# Altium PCB CH32V003_V0.1.PcbDoc
Units mm, origin at the board's own origin, x right, y up, seen from the top; angles counter-clockwise.
Board outline 28.32 x 50.93 mm, 4 copper layers (SIG1, GND, PWR, SIG2), stack 1.57 mm thick; 25 components, 32 nets, 101 pads, 315 vias.
Unrouted connection lines stored in the file: 7.
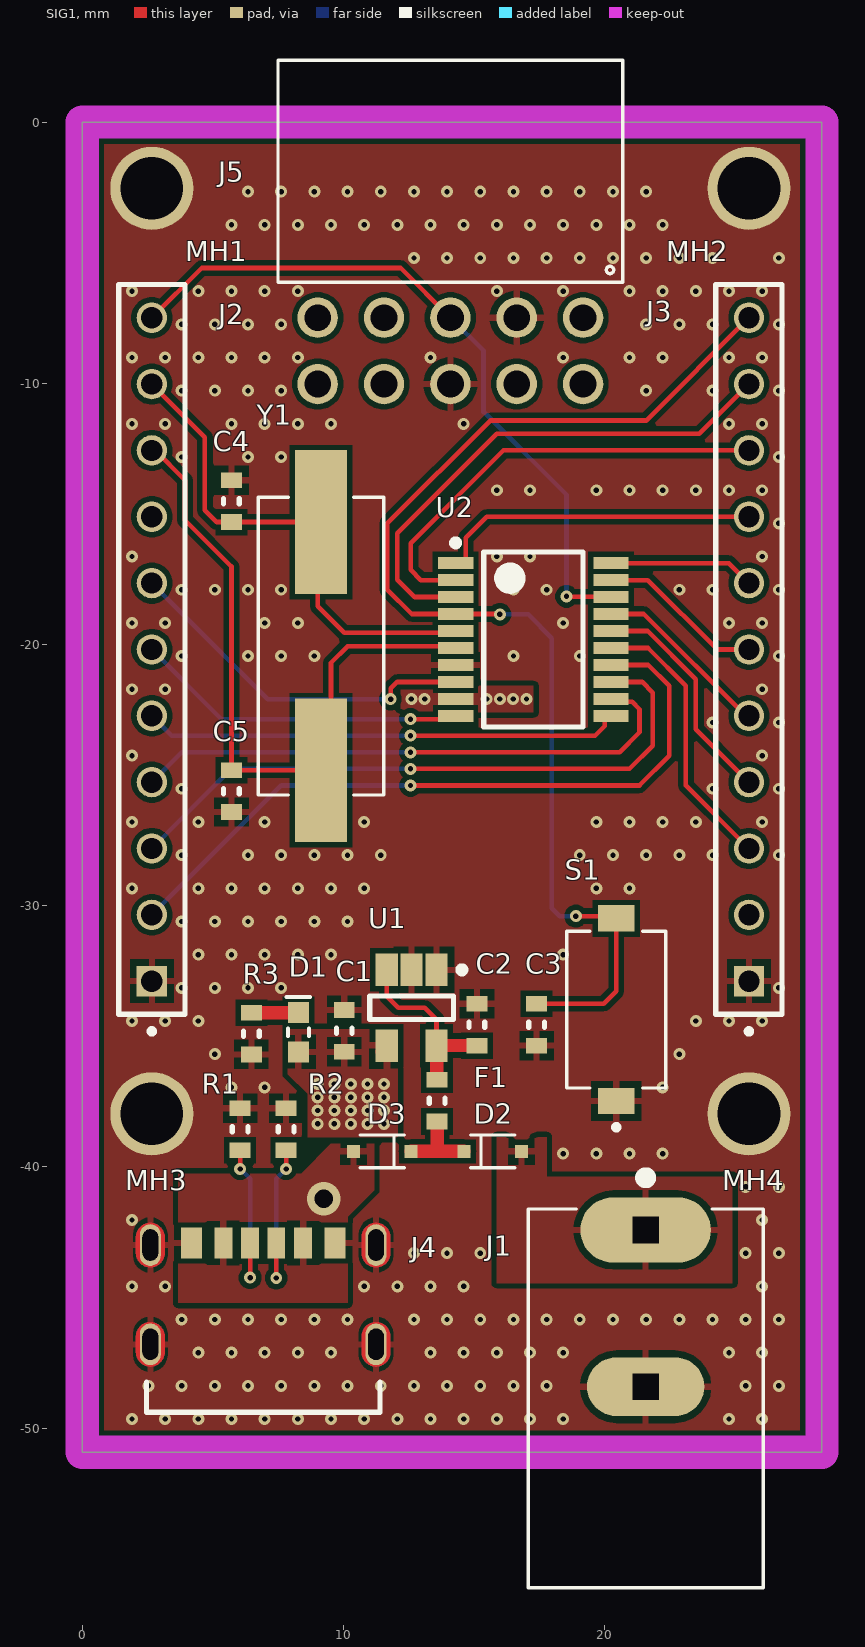
[diagram p0: SIG1 view]
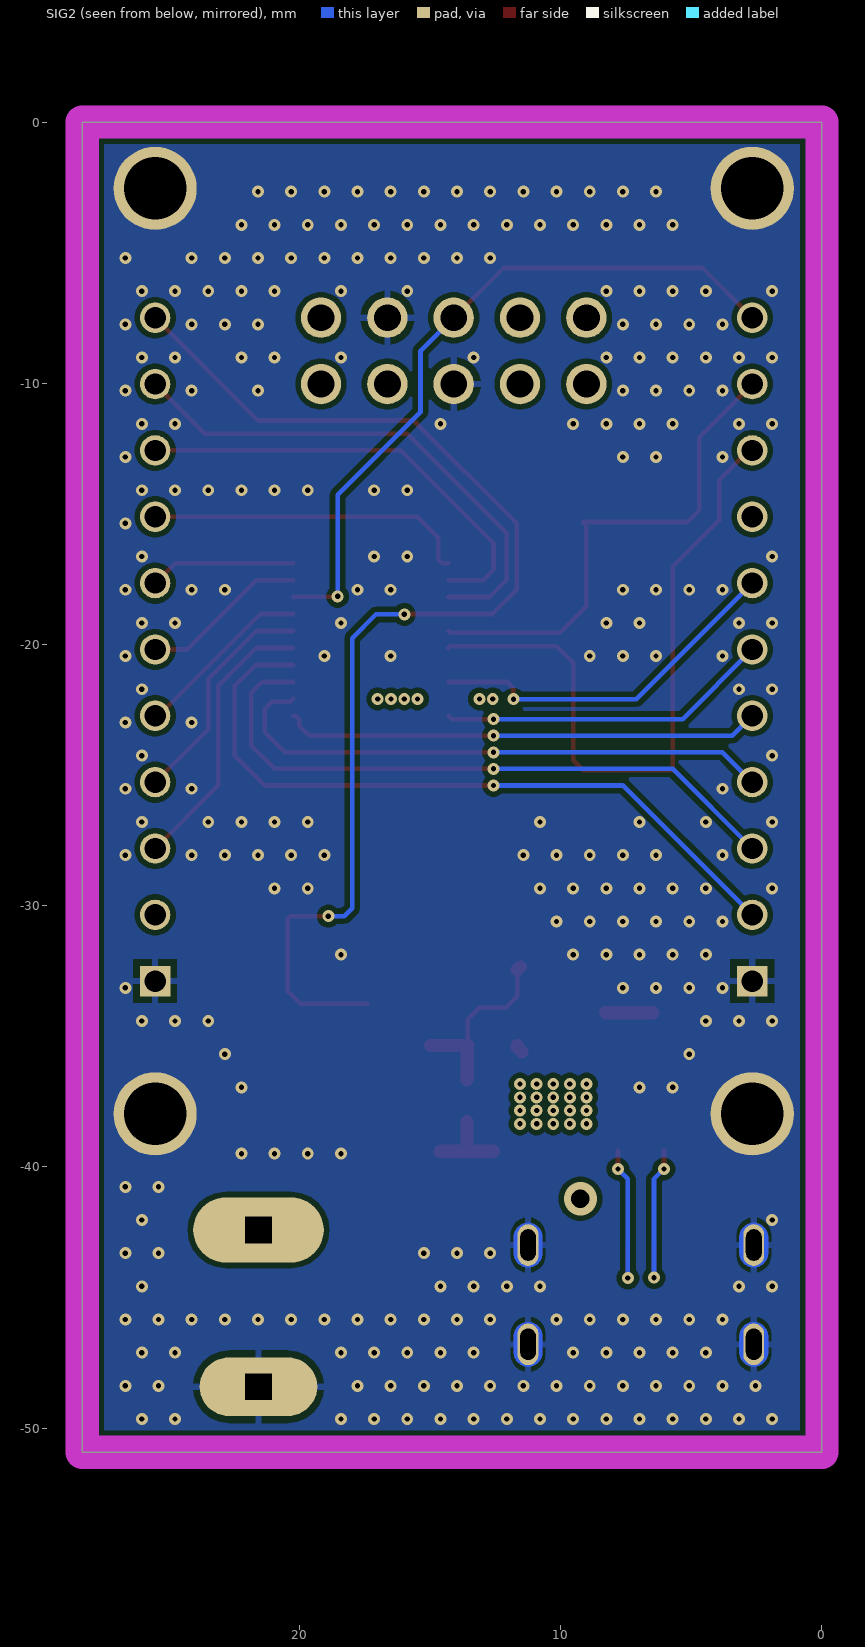
[diagram p1: SIG2 view, seen from below]
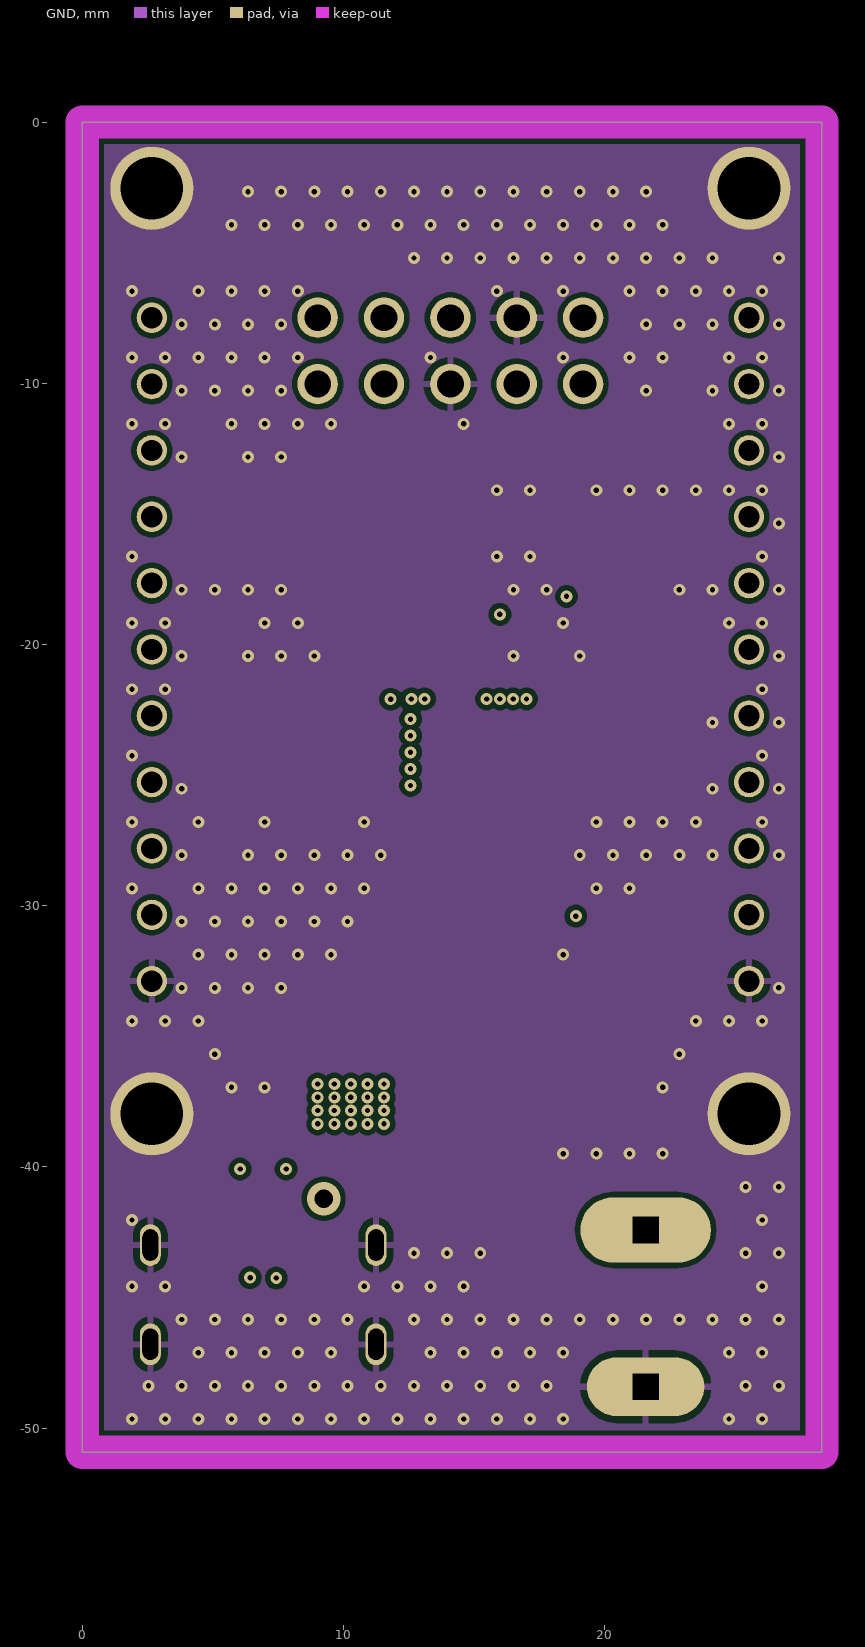
[diagram p2: GND]
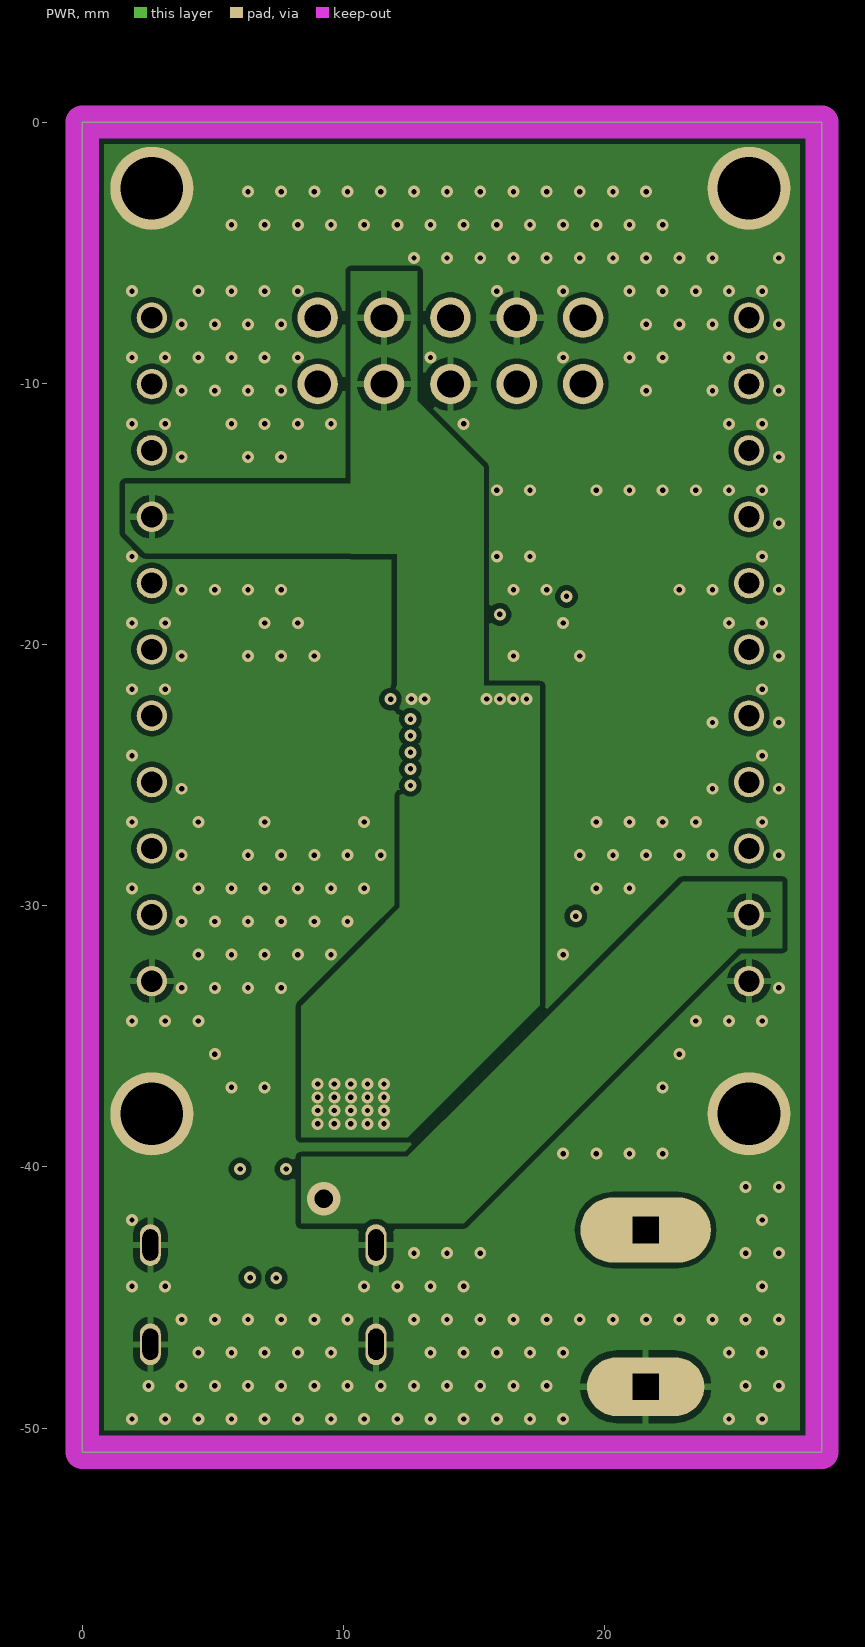
[diagram p3: PWR]

## Layer stack, top to bottom
Top Mask: solder mask 0.015, Solder Resist, Dk 3.8
SIG1: signal copper 0.035
Dielectric 1: prepreg 0.2, 7628, Dk 4.6
GND: signal copper 0.0175
Core: core 1.065, FR-4, Dk 4.5
PWR: signal copper 0.0175
Dielectric 2: prepreg 0.2, 7628, Dk 4.6
SIG2: signal copper 0.035
Bottom Mask: solder mask 0.015, Solder Resist, Dk 3.8

## Board outline
0,-50.927 28.321,-50.927 28.321,0 0,0

## Design rules (kind name [scope] priority, off if disabled: settings)
BoardOutlineClearance [All] p1: gap=0.2 ignorepadtopadclearanceinfootprint=FALSE except(0.4: Arc-SplitBarrior Arc-SplitContinuation Track-SplitBarrior Track-SplitContinuation SMDPad-SplitBarrior SMDPad-SplitContinuation THPad-SplitBarrior THPad-SplitContinuation Via-SplitBarrior Via-SplitContinuation Fill-SplitBarrior Fill-SplitContinuation Poly-SplitBarrior Poly-SplitContinuation Region-SplitBarrior Region-SplitContinuation Text-SplitBarrior Text-SplitContinuation)
Clearance "Clearance Bottom Layer" [OnLayer('Bottom Layer')] p1: gap=0.203 ignorepadtopadclearanceinfootprint=TRUE except(0.254: Arc-Text Track-Text SMDPad-Text THPad-Text Via-Text Fill-Text Poly-Text Region-Text Text-Text)
Clearance "Clearance Top Layer" [OnLayer('Top Layer')] p2: gap=0.203 ignorepadtopadclearanceinfootprint=TRUE except(0.254: Arc-Text Track-Text SMDPad-Text THPad-Text Via-Text Fill-Text Poly-Text Region-Text Text-Text)
Clearance [All] p3: gap=0.2 ignorepadtopadclearanceinfootprint=FALSE except(0.089: Arc-Arc Arc-Track Arc-SMDPad Track-Track Track-SMDPad SMDPad-SMDPad; 0.127: Arc-Via Track-Via SMDPad-Via THPad-Via Via-Via; 0.254: Arc-Text Track-Text SMDPad-Text THPad-Text Via-Text Fill-Text Poly-Text Region-Text Text-Text)
HoleSize [All] p1: absolutevalues=TRUE maxlimit=6.3 minlimit=0.2 maxpercent=80.000 minpercent=20.000
MinimumAnnularRing [All] p1: minimumring=0.076
MinimumSolderMaskSliver [All] p1: minsoldermaskwidth=0.1
PolygonConnect PolygonConnect_Vias [All vs IsVia] p1: connectstyle=Direct reliefconductorwidth=0.254 reliefentries=4 polygonreliefangle="90 Angle" airgapwidth=0.254
PolygonConnect PolygonConnect_Relief [All] p2: connectstyle=Relief reliefconductorwidth=0.254 reliefentries=4 polygonreliefangle="90 Angle" airgapwidth=0.254
PolygonConnect PolygonConnect_NoRelief [InPadClass('NoRelief')] p3: connectstyle=Direct reliefconductorwidth=0.508 reliefentries=4 polygonreliefangle="90 Angle" airgapwidth=0.254
RoutingCorners [All] p1: cornerstyle=Round minsetback=2.54 maxsetback=2.54
RoutingVias [All] p1: holewidth=0.5 width=1 viastyle="Through Hole" minholewidth=0.2 minwidth=0.45 maxholewidth=1 maxwidth=2
SilkToSilkClearance [All] p1: silktosilkclearance=0.1
SilkToSolderMaskClearance [IsPad] p1: minsilkscreentomaskgap=0.1 clearancetoexposedcopper=TRUE
SolderMaskExpansion SolderMaskExpansion_Vias [IsVia] p1: expansion=0.102 istentingtop=TRUE
SolderMaskExpansion [All] p2: expansion=0.102 istentingtop=FALSE
Width [All] p1: maxlimit=2.54 minlimit=0.089 preferedwidth=0.381
25 further rules are at their usual default settings.

## Classes and differential pairs
pad class NoRelief: MH1-1 MH2-1 MH3-1 MH4-1

## Components (designator, comment, footprint, x,y, rotation, side; value= is the part's Value field where it differs from the comment)
C1 "10uF" 0603 10.033,-34.798 r270 top
C2 "10uF" 0603 15.113,-34.559 r270 top
C3 "0.10uF" 0603 17.399,-34.559 r90 top
C4 "=VALUE" 0603 5.715,-14.516 r270 top
C5 "=VALUE" 0603 5.715,-25.616 r90 top
D1 "0603 2V" "0603 - LED" 8.281,-34.848 r90 top
D2 "BAT760" SOD323(F) 15.72,-39.408 r180 top
D3 "BAT760" SOD323(F) 11.488,-39.408 r0 top
F1 "FUSE 1A 32V FAST" 0603 13.589,-37.465 r90 top
J1 "PJ-037A" CUI_PJ-037A 21.571,-42.418 r270 top locked
J2 "PH1-11-UA" "11POS 2.54mm Male Header" 2.667,-20.193 r90 top locked
J3 "PH1-11-UA" "11POS 2.54mm Male Header" 25.527,-20.193 r90 top locked
J4 "USB4125-GF-A_REVA2" GCT_USB4125-GF-A_REVA2 6.929,-45.996 r0 top
J5 "613010243121" 613010243121 14.097,-8.763 r180 top locked
MH1 "M2 Hole" "Mounting Hole M2"#1 2.54,-0.889 r0 top locked
MH2 "M2 Hole" "Mounting Hole M2"#2 26.035,-0.508 r0 top locked
MH3 "M2 Hole" "Mounting Hole M2"#3 2.667,-37.973 r0 top locked
MH4 "M2 Hole" "Mounting Hole M2"#4 25.527,-38.354 r0 top locked
R1 "5.1k" 0603 6.048,-38.56 r90 top
R2 "5.1k" 0603 7.81,-38.56 r90 top
R3 "10k" 0603 6.477,-34.898 r90 top
S1 "ATS2D3G_NC_LFG" SW_ATS2D3G_NC_LFG 20.447,-33.985 r90 top
U1 "NCP114" SOT95P295X110-5NW 12.612,-33.909 r270 top
U2 "CH32V003F4P6" TSOP65P640X110-20N 17.272,-19.812 r0 top
Y1 "ECS-240-20-5PX-TR" XTAL_ECS-240-20-5PX-TR 9.144,-20.066 r270 top

## Footprints (in the part's own frame and the unit in brackets; to place one, negate y for a bottom-side part, rotate by r counter-clockwise, add the part's x,y. Pads: shape width x height; smd on the part's side, far side on the other; paste and mask are expansions set on the pad)
"11POS 2.54mm Male Header" [mil]
  rect 45.78x45.78 / inner round 45.78 / far side rect 45.78x45.78 hole 32: 01(-500,0)
  round 45.78 hole 32: 02(-400,0) 03(-300,0) 04(-200,0) 05(-100,0) 06(0,0) 07(100,0) 08(200,0) 09(300,0) 10(400,0) 11(500,0)
  silkscreen extent -580,-50 550,50
0603 [mm] "Chip Resistor, 2-Leads, Body 1.60x0.80mm, IPC High Density"
  rect 0.6x0.8 smd mask+0.1: 1(-0.8,0) 2(0.8,0)
  silkscreen extent -0.1,-0.3 0.1,0.3, body extent -0.8,-0.4 0.8,0.4, height 0.6
"0603 - LED" [mm]
  rect 0.8x0.8 smd: 1(-0.75,0) 2(0.75,0)
  silkscreen extent -0.15,-0.45 1.35,0.45, body extent -0.8,-0.4 0.8,0.4, height 0.65
613010243121 [mm]
  round 1.545 hole 1.03: 1(-5.08,-1.27) 2(-5.08,1.27) 3(-2.54,-1.27) 4(-2.54,1.27) 5(0,-1.27) 6(0,1.27) 7(2.54,-1.27) 8(2.54,1.27) 9(5.08,-1.27) 10(5.08,1.27)
  silkscreen extent -6.6,-11.13 6.6,-2.63, body extent -6.6,-11.11 6.6,1.49, height 5.04
CUI_PJ-037A [mm]
  oval 2.5x5 hole 1 square: 1(0,0)
  oval 2.25x4.5 hole 1 square: 2(6,0)
  silkscreen extent -2.2,-4.5 13.7,4.5, body extent -0.77,-4.57 13.73,4.43, height 11
GCT_USB4125-GF-A_REVA2 [mm]
  rect 0.686x1.2 smd: A5(-0.5,3.08) A9(1.52,3.08) B5(0.5,3.08) B9(-1.52,3.08)
  rect 0.8x1.2 smd: A12(2.75,3.08) B12(-2.75,3.08)
  oval 0.8x1.6 hole 0.6 slot 1.2 at 90 deg mask+0: S1(-4.32,3) S2(4.32,3) S3(-4.32,-0.8) S4(4.32,-0.8)
  SIG1 region: -4.291,0.049 -4.263,0.047 -4.234,0.043 -4.206,0.038 -4.178,0.031 -4.15,0.023 -4.123,0.013 -4.096,0.002 -4.07,-0.01 -4.045,-0.024 -4.02,-0.039 -3.997,-0.055 -3.974,-0.073 -3.952,-0.091 -3.931,-0.111 -3.911,-0.132 -3.893,-0.154 -3.875,-0.177 -3.859,-0.2 -3.844,-0.225 -3.83,-0.25 -3.818,-0.276 -3.807,-0.303 -3.797,-0.33 -3.789,-0.358 -3.782,-0.386 -3.777,-0.414 -3.773,-0.443 -3.771,-0.471 -3.77,-0.5 -3.77,-1.1 -3.771,-1.129 -3.773,-1.157 -3.777,-1.186 -3.782,-1.214 -3.789,-1.242 -3.797,-1.27 -3.807,-1.297 -3.818,-1.324 -3.83,-1.35 -3.844,-1.375 -3.859,-1.4 -3.875,-1.423 -3.893,-1.446 -3.911,-1.468 -3.931,-1.489 -3.952,-1.509 -3.974,-1.527 -3.997,-1.545 -4.02,-1.561 -4.045,-1.576 -4.07,-1.59 -4.096,-1.602 -4.123,-1.613 -4.15,-1.623 -4.178,-1.631 -4.206,-1.638 -4.234,-1.643 -4.263,-1.647 -4.291,-1.649 -4.32,-1.65 -4.349,-1.649 -4.377,-1.647 -4.406,-1.643 -4.434,-1.638 -4.462,-1.631 -4.49,-1.623 -4.517,-1.613 -4.544,-1.602 -4.57,-1.59 -4.595,-1.576 -4.62,-1.561 -4.643,-1.545 -4.666,-1.527 -4.688,-1.509 -4.709,-1.489 -4.729,-1.468 -4.747,-1.446 -4.765,-1.423 -4.781,-1.4 -4.796,-1.375 -4.81,-1.35 -4.822,-1.324 -4.833,-1.297 -4.843,-1.27 -4.851,-1.242 -4.858,-1.214 -4.863,-1.186 -4.867,-1.157 -4.869,-1.129 -4.87,-1.1 -4.87,-0.5 -4.869,-0.471 -4.867,-0.443 -4.863,-0.414 -4.858,-0.386 -4.851,-0.358 -4.843,-0.33 -4.833,-0.303 -4.822,-0.276 -4.81,-0.25 -4.796,-0.225 -4.781,-0.2 -4.765,-0.177 -4.747,-0.154 -4.729,-0.132 -4.709,-0.111 -4.688,-0.091 -4.666,-0.073 -4.643,-0.055 -4.62,-0.039 -4.595,-0.024 -4.57,-0.01 -4.544,0.002 -4.517,0.013 -4.49,0.023 -4.462,0.031 -4.434,0.038 -4.406,0.043 -4.377,0.047 -4.349,0.049 -4.32,0.05
  SIG1 region: 4.349,0.049 4.377,0.047 4.406,0.043 4.434,0.038 4.462,0.031 4.49,0.023 4.517,0.013 4.544,0.002 4.57,-0.01 4.595,-0.024 4.62,-0.039 4.643,-0.055 4.666,-0.073 4.688,-0.091 4.709,-0.111 4.729,-0.132 4.747,-0.154 4.765,-0.177 4.781,-0.2 4.796,-0.225 4.81,-0.25 4.822,-0.276 4.833,-0.303 4.843,-0.33 4.851,-0.358 4.858,-0.386 4.863,-0.414 4.867,-0.443 4.869,-0.471 4.87,-0.5 4.87,-1.1 4.869,-1.129 4.867,-1.157 4.863,-1.186 4.858,-1.214 4.851,-1.242 4.843,-1.27 4.833,-1.297 4.822,-1.324 4.81,-1.35 4.796,-1.375 4.781,-1.4 4.765,-1.423 4.747,-1.446 4.729,-1.468 4.709,-1.489 4.688,-1.509 4.666,-1.527 4.643,-1.545 4.62,-1.561 4.595,-1.576 4.57,-1.59 4.544,-1.602 4.517,-1.613 4.49,-1.623 4.462,-1.631 4.434,-1.638 4.406,-1.643 4.377,-1.647 4.349,-1.649 4.32,-1.65 4.291,-1.649 4.263,-1.647 4.234,-1.643 4.206,-1.638 4.178,-1.631 4.15,-1.623 4.123,-1.613 4.096,-1.602 4.07,-1.59 4.045,-1.576 4.02,-1.561 3.997,-1.545 3.974,-1.527 3.952,-1.509 3.931,-1.489 3.911,-1.468 3.893,-1.446 3.875,-1.423 3.859,-1.4 3.844,-1.375 3.83,-1.35 3.818,-1.324 3.807,-1.297 3.797,-1.27 3.789,-1.242 3.782,-1.214 3.777,-1.186 3.773,-1.157 3.771,-1.129 3.77,-1.1 3.77,-0.5 3.771,-0.471 3.773,-0.443 3.777,-0.414 3.782,-0.386 3.789,-0.358 3.797,-0.33 3.807,-0.303 3.818,-0.276 3.83,-0.25 3.844,-0.225 3.859,-0.2 3.875,-0.177 3.893,-0.154 3.911,-0.132 3.931,-0.111 3.952,-0.091 3.974,-0.073 3.997,-0.055 4.02,-0.039 4.045,-0.024 4.07,-0.01 4.096,0.002 4.123,0.013 4.15,0.023 4.178,0.031 4.206,0.038 4.234,0.043 4.263,0.047 4.291,0.049 4.32,0.05
  SIG1 region: -4.291,3.849 -4.263,3.847 -4.234,3.843 -4.206,3.838 -4.178,3.831 -4.15,3.823 -4.123,3.813 -4.096,3.802 -4.07,3.79 -4.045,3.776 -4.02,3.761 -3.997,3.745 -3.974,3.727 -3.952,3.709 -3.931,3.689 -3.911,3.668 -3.893,3.646 -3.875,3.623 -3.859,3.6 -3.844,3.575 -3.83,3.55 -3.818,3.524 -3.807,3.497 -3.797,3.47 -3.789,3.442 -3.782,3.414 -3.777,3.386 -3.773,3.357 -3.771,3.329 -3.77,3.3 -3.77,2.7 -3.771,2.671 -3.773,2.643 -3.777,2.614 -3.782,2.586 -3.789,2.558 -3.797,2.53 -3.807,2.503 -3.818,2.476 -3.83,2.45 -3.844,2.425 -3.859,2.4 -3.875,2.377 -3.893,2.354 -3.911,2.332 -3.931,2.311 -3.952,2.291 -3.974,2.273 -3.997,2.255 -4.02,2.239 -4.045,2.224 -4.07,2.21 -4.096,2.198 -4.123,2.187 -4.15,2.177 -4.178,2.169 -4.206,2.162 -4.234,2.157 -4.263,2.153 -4.291,2.151 -4.32,2.15 -4.349,2.151 -4.377,2.153 -4.406,2.157 -4.434,2.162 -4.462,2.169 -4.49,2.177 -4.517,2.187 -4.544,2.198 -4.57,2.21 -4.595,2.224 -4.62,2.239 -4.643,2.255 -4.666,2.273 -4.688,2.291 -4.709,2.311 -4.729,2.332 -4.747,2.354 -4.765,2.377 -4.781,2.4 -4.796,2.425 -4.81,2.45 -4.822,2.476 -4.833,2.503 -4.843,2.53 -4.851,2.558 -4.858,2.586 -4.863,2.614 -4.867,2.643 -4.869,2.671 -4.87,2.7 -4.87,3.3 -4.869,3.329 -4.867,3.357 -4.863,3.386 -4.858,3.414 -4.851,3.442 -4.843,3.47 -4.833,3.497 -4.822,3.524 -4.81,3.55 -4.796,3.575 -4.781,3.6 -4.765,3.623 -4.747,3.646 -4.729,3.668 -4.709,3.689 -4.688,3.709 -4.666,3.727 -4.643,3.745 -4.62,3.761 -4.595,3.776 -4.57,3.79 -4.544,3.802 -4.517,3.813 -4.49,3.823 -4.462,3.831 -4.434,3.838 -4.406,3.843 -4.377,3.847 -4.349,3.849 -4.32,3.85
  SIG1 region: 4.349,3.849 4.377,3.847 4.406,3.843 4.434,3.838 4.462,3.831 4.49,3.823 4.517,3.813 4.544,3.802 4.57,3.79 4.595,3.776 4.62,3.761 4.643,3.745 4.666,3.727 4.688,3.709 4.709,3.689 4.729,3.668 4.747,3.646 4.765,3.623 4.781,3.6 4.796,3.575 4.81,3.55 4.822,3.524 4.833,3.497 4.843,3.47 4.851,3.442 4.858,3.414 4.863,3.386 4.867,3.357 4.869,3.329 4.87,3.3 4.87,2.7 4.869,2.671 4.867,2.643 4.863,2.614 4.858,2.586 4.851,2.558 4.843,2.53 4.833,2.503 4.822,2.476 4.81,2.45 4.796,2.425 4.781,2.4 4.765,2.377 4.747,2.354 4.729,2.332 4.709,2.311 4.688,2.291 4.666,2.273 4.643,2.255 4.62,2.239 4.595,2.224 4.57,2.21 4.544,2.198 4.517,2.187 4.49,2.177 4.462,2.169 4.434,2.162 4.406,2.157 4.377,2.153 4.349,2.151 4.32,2.15 4.291,2.151 4.263,2.153 4.234,2.157 4.206,2.162 4.178,2.169 4.15,2.177 4.123,2.187 4.096,2.198 4.07,2.21 4.045,2.224 4.02,2.239 3.997,2.255 3.974,2.273 3.952,2.291 3.931,2.311 3.911,2.332 3.893,2.354 3.875,2.377 3.859,2.4 3.844,2.425 3.83,2.45 3.818,2.476 3.807,2.503 3.797,2.53 3.789,2.558 3.782,2.586 3.777,2.614 3.773,2.643 3.771,2.671 3.77,2.7 3.77,3.3 3.771,3.329 3.773,3.357 3.777,3.386 3.782,3.414 3.789,3.442 3.797,3.47 3.807,3.497 3.818,3.524 3.83,3.55 3.844,3.575 3.859,3.6 3.875,3.623 3.893,3.646 3.911,3.668 3.931,3.689 3.952,3.709 3.974,3.727 3.997,3.745 4.02,3.761 4.045,3.776 4.07,3.79 4.096,3.802 4.123,3.813 4.15,3.823 4.178,3.831 4.206,3.838 4.234,3.843 4.263,3.847 4.291,3.849 4.32,3.85
  SIG2 region: -4.291,0.049 -4.263,0.047 -4.234,0.043 -4.206,0.038 -4.178,0.031 -4.15,0.023 -4.123,0.013 -4.096,0.002 -4.07,-0.01 -4.045,-0.024 -4.02,-0.039 -3.997,-0.055 -3.974,-0.073 -3.952,-0.091 -3.931,-0.111 -3.911,-0.132 -3.893,-0.154 -3.875,-0.177 -3.859,-0.2 -3.844,-0.225 -3.83,-0.25 -3.818,-0.276 -3.807,-0.303 -3.797,-0.33 -3.789,-0.358 -3.782,-0.386 -3.777,-0.414 -3.773,-0.443 -3.771,-0.471 -3.77,-0.5 -3.77,-1.1 -3.771,-1.129 -3.773,-1.157 -3.777,-1.186 -3.782,-1.214 -3.789,-1.242 -3.797,-1.27 -3.807,-1.297 -3.818,-1.324 -3.83,-1.35 -3.844,-1.375 -3.859,-1.4 -3.875,-1.423 -3.893,-1.446 -3.911,-1.468 -3.931,-1.489 -3.952,-1.509 -3.974,-1.527 -3.997,-1.545 -4.02,-1.561 -4.045,-1.576 -4.07,-1.59 -4.096,-1.602 -4.123,-1.613 -4.15,-1.623 -4.178,-1.631 -4.206,-1.638 -4.234,-1.643 -4.263,-1.647 -4.291,-1.649 -4.32,-1.65 -4.349,-1.649 -4.377,-1.647 -4.406,-1.643 -4.434,-1.638 -4.462,-1.631 -4.49,-1.623 -4.517,-1.613 -4.544,-1.602 -4.57,-1.59 -4.595,-1.576 -4.62,-1.561 -4.643,-1.545 -4.666,-1.527 -4.688,-1.509 -4.709,-1.489 -4.729,-1.468 -4.747,-1.446 -4.765,-1.423 -4.781,-1.4 -4.796,-1.375 -4.81,-1.35 -4.822,-1.324 -4.833,-1.297 -4.843,-1.27 -4.851,-1.242 -4.858,-1.214 -4.863,-1.186 -4.867,-1.157 -4.869,-1.129 -4.87,-1.1 -4.87,-0.5 -4.869,-0.471 -4.867,-0.443 -4.863,-0.414 -4.858,-0.386 -4.851,-0.358 -4.843,-0.33 -4.833,-0.303 -4.822,-0.276 -4.81,-0.25 -4.796,-0.225 -4.781,-0.2 -4.765,-0.177 -4.747,-0.154 -4.729,-0.132 -4.709,-0.111 -4.688,-0.091 -4.666,-0.073 -4.643,-0.055 -4.62,-0.039 -4.595,-0.024 -4.57,-0.01 -4.544,0.002 -4.517,0.013 -4.49,0.023 -4.462,0.031 -4.434,0.038 -4.406,0.043 -4.377,0.047 -4.349,0.049 -4.32,0.05
  SIG2 region: 4.349,0.049 4.377,0.047 4.406,0.043 4.434,0.038 4.462,0.031 4.49,0.023 4.517,0.013 4.544,0.002 4.57,-0.01 4.595,-0.024 4.62,-0.039 4.643,-0.055 4.666,-0.073 4.688,-0.091 4.709,-0.111 4.729,-0.132 4.747,-0.154 4.765,-0.177 4.781,-0.2 4.796,-0.225 4.81,-0.25 4.822,-0.276 4.833,-0.303 4.843,-0.33 4.851,-0.358 4.858,-0.386 4.863,-0.414 4.867,-0.443 4.869,-0.471 4.87,-0.5 4.87,-1.1 4.869,-1.129 4.867,-1.157 4.863,-1.186 4.858,-1.214 4.851,-1.242 4.843,-1.27 4.833,-1.297 4.822,-1.324 4.81,-1.35 4.796,-1.375 4.781,-1.4 4.765,-1.423 4.747,-1.446 4.729,-1.468 4.709,-1.489 4.688,-1.509 4.666,-1.527 4.643,-1.545 4.62,-1.561 4.595,-1.576 4.57,-1.59 4.544,-1.602 4.517,-1.613 4.49,-1.623 4.462,-1.631 4.434,-1.638 4.406,-1.643 4.377,-1.647 4.349,-1.649 4.32,-1.65 4.291,-1.649 4.263,-1.647 4.234,-1.643 4.206,-1.638 4.178,-1.631 4.15,-1.623 4.123,-1.613 4.096,-1.602 4.07,-1.59 4.045,-1.576 4.02,-1.561 3.997,-1.545 3.974,-1.527 3.952,-1.509 3.931,-1.489 3.911,-1.468 3.893,-1.446 3.875,-1.423 3.859,-1.4 3.844,-1.375 3.83,-1.35 3.818,-1.324 3.807,-1.297 3.797,-1.27 3.789,-1.242 3.782,-1.214 3.777,-1.186 3.773,-1.157 3.771,-1.129 3.77,-1.1 3.77,-0.5 3.771,-0.471 3.773,-0.443 3.777,-0.414 3.782,-0.386 3.789,-0.358 3.797,-0.33 3.807,-0.303 3.818,-0.276 3.83,-0.25 3.844,-0.225 3.859,-0.2 3.875,-0.177 3.893,-0.154 3.911,-0.132 3.931,-0.111 3.952,-0.091 3.974,-0.073 3.997,-0.055 4.02,-0.039 4.045,-0.024 4.07,-0.01 4.096,0.002 4.123,0.013 4.15,0.023 4.178,0.031 4.206,0.038 4.234,0.043 4.263,0.047 4.291,0.049 4.32,0.05
  SIG2 region: -4.291,3.849 -4.263,3.847 -4.234,3.843 -4.206,3.838 -4.178,3.831 -4.15,3.823 -4.123,3.813 -4.096,3.802 -4.07,3.79 -4.045,3.776 -4.02,3.761 -3.997,3.745 -3.974,3.727 -3.952,3.709 -3.931,3.689 -3.911,3.668 -3.893,3.646 -3.875,3.623 -3.859,3.6 -3.844,3.575 -3.83,3.55 -3.818,3.524 -3.807,3.497 -3.797,3.47 -3.789,3.442 -3.782,3.414 -3.777,3.386 -3.773,3.357 -3.771,3.329 -3.77,3.3 -3.77,2.7 -3.771,2.671 -3.773,2.643 -3.777,2.614 -3.782,2.586 -3.789,2.558 -3.797,2.53 -3.807,2.503 -3.818,2.476 -3.83,2.45 -3.844,2.425 -3.859,2.4 -3.875,2.377 -3.893,2.354 -3.911,2.332 -3.931,2.311 -3.952,2.291 -3.974,2.273 -3.997,2.255 -4.02,2.239 -4.045,2.224 -4.07,2.21 -4.096,2.198 -4.123,2.187 -4.15,2.177 -4.178,2.169 -4.206,2.162 -4.234,2.157 -4.263,2.153 -4.291,2.151 -4.32,2.15 -4.349,2.151 -4.377,2.153 -4.406,2.157 -4.434,2.162 -4.462,2.169 -4.49,2.177 -4.517,2.187 -4.544,2.198 -4.57,2.21 -4.595,2.224 -4.62,2.239 -4.643,2.255 -4.666,2.273 -4.688,2.291 -4.709,2.311 -4.729,2.332 -4.747,2.354 -4.765,2.377 -4.781,2.4 -4.796,2.425 -4.81,2.45 -4.822,2.476 -4.833,2.503 -4.843,2.53 -4.851,2.558 -4.858,2.586 -4.863,2.614 -4.867,2.643 -4.869,2.671 -4.87,2.7 -4.87,3.3 -4.869,3.329 -4.867,3.357 -4.863,3.386 -4.858,3.414 -4.851,3.442 -4.843,3.47 -4.833,3.497 -4.822,3.524 -4.81,3.55 -4.796,3.575 -4.781,3.6 -4.765,3.623 -4.747,3.646 -4.729,3.668 -4.709,3.689 -4.688,3.709 -4.666,3.727 -4.643,3.745 -4.62,3.761 -4.595,3.776 -4.57,3.79 -4.544,3.802 -4.517,3.813 -4.49,3.823 -4.462,3.831 -4.434,3.838 -4.406,3.843 -4.377,3.847 -4.349,3.849 -4.32,3.85
  SIG2 region: 4.349,3.849 4.377,3.847 4.406,3.843 4.434,3.838 4.462,3.831 4.49,3.823 4.517,3.813 4.544,3.802 4.57,3.79 4.595,3.776 4.62,3.761 4.643,3.745 4.666,3.727 4.688,3.709 4.709,3.689 4.729,3.668 4.747,3.646 4.765,3.623 4.781,3.6 4.796,3.575 4.81,3.55 4.822,3.524 4.833,3.497 4.843,3.47 4.851,3.442 4.858,3.414 4.863,3.386 4.867,3.357 4.869,3.329 4.87,3.3 4.87,2.7 4.869,2.671 4.867,2.643 4.863,2.614 4.858,2.586 4.851,2.558 4.843,2.53 4.833,2.503 4.822,2.476 4.81,2.45 4.796,2.425 4.781,2.4 4.765,2.377 4.747,2.354 4.729,2.332 4.709,2.311 4.688,2.291 4.666,2.273 4.643,2.255 4.62,2.239 4.595,2.224 4.57,2.21 4.544,2.198 4.517,2.187 4.49,2.177 4.462,2.169 4.434,2.162 4.406,2.157 4.377,2.153 4.349,2.151 4.32,2.15 4.291,2.151 4.263,2.153 4.234,2.157 4.206,2.162 4.178,2.169 4.15,2.177 4.123,2.187 4.096,2.198 4.07,2.21 4.045,2.224 4.02,2.239 3.997,2.255 3.974,2.273 3.952,2.291 3.931,2.311 3.911,2.332 3.893,2.354 3.875,2.377 3.859,2.4 3.844,2.425 3.83,2.45 3.818,2.476 3.807,2.503 3.797,2.53 3.789,2.558 3.782,2.586 3.777,2.614 3.773,2.643 3.771,2.671 3.77,2.7 3.77,3.3 3.771,3.329 3.773,3.357 3.777,3.386 3.782,3.414 3.789,3.442 3.797,3.47 3.807,3.497 3.818,3.524 3.83,3.55 3.844,3.575 3.859,3.6 3.875,3.623 3.893,3.646 3.911,3.668 3.931,3.689 3.952,3.709 3.974,3.727 3.997,3.745 4.02,3.761 4.045,3.776 4.07,3.79 4.096,3.802 4.123,3.813 4.15,3.823 4.178,3.831 4.206,3.838 4.234,3.843 4.263,3.847 4.291,3.849 4.32,3.85
  silkscreen extent -4.47,-3.4 4.47,-2.25, body extent -4.47,-3.45 4.47,3.45, height 3.26
"Mounting Hole M2"#1 [mm]
  round 3.18 hole 2.4: 1(0.127,-1.651)
"Mounting Hole M2"#2 [mm]
  round 3.18 hole 2.4: 1(-0.508,-2.032)
"Mounting Hole M2"#3 [mm]
  round 3.18 hole 2.4: 1(0,0)
"Mounting Hole M2"#4 [mm]
  round 3.18 hole 2.4: 1(0,0.381)
SOD323(F) [mm]
  rect 0.5x0.5 smd: 1(1.1,0) 2(-1.1,0)
  silkscreen extent -0.85,-0.63 0.85,0.63
SOT95P295X110-5NW [mm] "SOT23, 5-Leads, Body 3.00x2.95mm, Pitch 0.95mm, IPC Medium Density"
  rect 1.25x0.85 smd: 1(-1.45,0.95) 2(-1.45,0) 3(-1.45,-0.95) 4(1.45,-0.95) 5(1.45,0.95)
  silkscreen extent -1.57,-1.6 0.45,2.05, body extent -0.82,-1.57 0.82,1.58, height 1.1
SW_ATS2D3G_NC_LFG [mm]
  rect 1x1.4 smd: 1(-3.5,0) 2(3.5,0)
  silkscreen extent -4.6,-1.9 3,1.9
TSOP65P640X110-20N [mm] "TSOP, 20-Leads, Body 6.50x4.40mm, Pitch 0.65mm, IPC Medium Density"
  rect 1.35x0.45 smd: 1(-2.975,2.925) 2(-2.975,2.275) 3(-2.975,1.625) 4(-2.975,0.975) 5(-2.975,0.325) 6(-2.975,-0.325) 7(-2.975,-0.975) 8(-2.975,-1.625) 9(-2.975,-2.275) 10(-2.975,-2.925) 11(2.975,-2.925) 12(2.975,-2.275) 13(2.975,-1.625) 14(2.975,-0.975) 15(2.975,-0.325) 16(2.975,0.325) 17(2.975,0.975) 18(2.975,1.625) 19(2.975,2.275) 20(2.975,2.925)
  silkscreen extent -3.1,-3.35 1.9,3.82, body extent -2.3,-3.35 2.3,3.35, height 1.1
XTAL_ECS-240-20-5PX-TR [mm]
  rect 5.5x2 smd: 1(-4.75,0) 2(4.75,0)
  silkscreen extent -5.7,-2.4 5.7,2.4, body extent -6.6,-2.39 6.6,2.41, height 4.3

## Part data
C1 C2: library part "CAP 10uF 10V", "Default Symbol for Capacitors", Rating=10V, Tolerance=10%, Part Number="CAP 10uF 10V"
C3: library part "CAP 0.1uF 50V", "Default Symbol for Capacitors", Rating=50V, Temperature Coefficient=X7R, Tolerance=10%, Part Number="CAP 0.1uF 50V"
C4 C5: library part "CAP 20pF 50V", "CAP CER 22pF 50V C0G 0603/0805"
D1: library part "LED GREEN SMD 0603", "LED Uni-Color Green 574nm 2-Pin Chip LED T/R", Current Rating=20mA, Manufacturer Part Number 1=LTST-C190KGKT, Supplier Part Number 1=160-1435-1-ND, Voltage Rating - DC=2V, Part Number="LED GREEN SMD 0603", Pin Count=2, Supplier 1=Digi-Key, Supplier URL 1=https://www.digikey.ca/en/products/detail/lite-on-inc/LTST-C190KGKT/386815?s=N4IgTCBcDaIIwDYAMBaOAWAzAVjSgcgCIgC6AvkA
D2 D3: "Diode Schottky 20V 1A _DC_ Surface Mount SOD-323", Package="SOD-323 NXP Semiconductors", Availability=Unavailable, MF="Nexperia USA", MP=BAT760, Price=None, SnapEDA_Link=https://www.snapeda.com/parts/BAT760/Nexperia%20USA%20Inc./view-part/182736/?ref=snap
F1: "FUSE 1A 32V DC 0603", Current Rating=1A, Operating Temperature="-55°C ~ 90°C", Voltage Rating - DC=32V, ComponentLink1Description=digikey, ComponentLink1URL=https://www.digikey.ca/en/products/detail/kemet/C0603C100K5RAC7867/8572397, Part Number="FUSE 1A 32V FAST", Pin Count=2, Response Time="Fast Blow", Supplier 1=Digi-Key, Supplier URL 1=https://www.digikey.ca/en/products/detail/kemet/C0603C100K5RAC7867/8572397
J1: "2.0 mm Center Pin, 2.5 A, Right Angle, Through Hole, Dc Power Jack Connector", Package=None, Availability=Unavailable, MP=PJ-037A, Price=None
J2 J3: "11POS Male Header", Package=None, Availability="In Stock", Check_prices=https://www.snapeda.com/parts/TS-111-T-A-1/Samtec/view-part/?ref=eda, MF=Samtec, MP=TS-111-T-A-1, Price=None, Purchase-URL=https://pricing.snapeda.com/search/part/TS-111-T-A-1/?ref=eda, SnapEDA_Link=https://www.snapeda.com/parts/TS-111-T-A-1/Samtec/view-part/?ref=snap
J4: Package=None, Availability=Unavailable, MP=USB4125-GF-A_REVA2, Price=None
J5: "10 Position Header Connector Through Hole, Right Angle", Package=None, Availability=Good, Check_prices=https://www.snapeda.com/parts/613010243121/W%C3%BCrth%20Elektronik/view-part/5049423/?ref=eda, MF="Wurth Elektronik", MP=613010243121, Price=None, Purchase-URL=https://pricing.snapeda.com/search/part/613010243121/?ref=eda, SnapEDA_Link=https://www.snapeda.com/parts/613010243121/W%C3%BCrth%20Elektronik/view-part/5049423/?ref=snap
MH1 MH2 MH3 MH4: library part "MOUNTING HOLE M2", "Standard M2 Mounting Hole for M2 Standoff", Part Number="MOUNTING HOLE M2"
R1 R2: library part "RES 5.1k 1/8W - 1%", "Default Resistor Symbol", Package=0805, Power (Watts)=0.125W, Tolerance=5%, Part Number="RES 5.1k 1/8W - 1%"
R3: library part "RES 10k 1/8W - 1%", "Default Resistor Symbol", Manufacturer Part Number 1=ERJ-H3GJ103V, Manufacturer Part Number 2=RMCF0805JT10K0, Package=0805, Power (Watts)=0.125W, Supplier Part Number 1=10-ERJ-H3GJ103VCT-ND, Tolerance=5%, Part Number="RES 10k 1/8W - 1%", Supplier 1=Digi-Key, Supplier 2=Digi-Key, Supplier Part Number 2=RMCF0805JT10K0CT-ND, Supplier URL 1=https://www.digikey.ca/en/products/detail/panasonic-electronic-components/ERJ-H3GJ103V/13877876?s=N4IgTCBcDaIIwAYC0BRASgKSQCQMwHENFcA1AYQBUkA5AERAF0BfIA, Supplier URL 2=https://www.digikey.ca/en/products/detail/stackpole-electronics-inc/RMCF0805JT10K0/1757762?s=N4IgTCBcDaIEoFkDCAxADADjQVgFIBUBGNAaTSXxAF0BfIA, Tolerance 2=5%
S1: "Tactile Switch SPST-NC Top Actuated Surface Mount", Package=None, Availability=Unavailable, MP=ATS2D3G_NC_LFG, Price=None
U1: "300 mA LDO that provides the engineer with a very / stable, accurate voltage with low noise suitable for space constrained, noise sensitive applications. In order to optimize performance for battery operated portable applications, the NCP114 employs the dynamic quiescent current adjustment for very low IQ consumption at no−load."
U2: "Microcontroller designed based on QingKe RISC-V2A / core, which supports 48MHz system main frequency in the product function. The series features wide voltage, / single-wire serial debug interface, low-power consumption and ultra-small package. It provides commonly used / peripheral functions, built-in 1 group of DMA controller, 1 group of 10-bit analog-to-digital conversion ADC, 1 / group of op-amp comparator, multiple timers, standard communication interfaces such as USART, I2C, SPI, etc. / The rated operating voltage of the product is 3.3V or 5V, and the operating temperature range is -40℃～85℃ / industrial- grade."
Y1: "24 MHz Â±30ppm Crystal 20pF 30 Ohms HC-49/US", Package="HC49/US ECS International", Check_prices=https://www.snapeda.com/parts/ECS-240-20-5PX-TR/ECS+Inc./view-part/?ref=eda, Digi-Key_Part_Number=XC1255TR-ND, MF="ECS Inc.", MP=ECS-240-20-5PX-TR, Purchase-URL=https://pricing.snapeda.com/search/part/ECS-240-20-5PX-TR/?ref=eda, SnapEDA_Link=https://www.snapeda.com/parts/ECS-240-20-5PX-TR/ECS+Inc./view-part/?ref=snap

## Via types
v1: diameter 0.457, hole 0.203, SIG1 to SIG2, tented both sides, 314 vias
v2: diameter 1.27, hole 0.711, SIG1 to SIG2, tented both sides, 1 vias

## Nets (pads, with @x,y where several pads share a name; then routed paths per layer and width w, separated by ;. In a path a pad name is that pad's centre, name@x,y a point inside that pad or via, vN(x,y) a via of type N, cw(c..) or ccw(c..) an arc to the next point about the centre after c; other vN are vias at no path point)
3V3: C1.2 D1.1 J2.08 J5.7 J5.8 U1.4 U2.9 | length 0.3
  SIG1 w0.508: U1.4@11.491,-35.598 11.662,-35.427 U1.4
  other v1: 9.017,-38.354 9.652,-38.354 10.287,-38.354 10.922,-38.354 11.557,-38.354 9.017,-37.846 9.652,-37.846 10.287,-37.846 10.922,-37.846 11.557,-37.846 9.017,-37.338 9.652,-37.338 10.287,-37.338 10.922,-37.338 11.557,-37.338 9.017,-36.83 9.652,-36.83 10.287,-36.83 10.922,-36.83 11.557,-36.83 12.603,-22.087 13.111,-22.087 15.483,-22.087 15.991,-22.087 16.499,-22.087 17.007,-22.087
5V: J5.9
GND: C1.1 C2.1 C3.1 C4.1 C5.1 J1.2 J2.01 J3.01 J4.A12 J4.B12 J4.S1 J4.S2 J4.S3 J4.S4 J5.3 J5.6 MH1.1 MH2.1 MH3.1 MH4.1 R1.2 R2.2 R3.1 S1.1 U1.1 U1.2 U2.7
  other v1: 1.905,-49.657 3.175,-49.657 4.445,-49.657 5.715,-49.657 6.985,-49.657 8.255,-49.657 9.525,-49.657 10.795,-49.657 12.065,-49.657 13.335,-49.657 14.605,-49.657 15.875,-49.657 17.145,-49.657 18.415,-49.657 24.765,-49.657 26.035,-49.657 2.54,-48.387 3.81,-48.387 5.08,-48.387 6.35,-48.387 7.62,-48.387 8.89,-48.387 10.16,-48.387 11.43,-48.387 12.7,-48.387 13.97,-48.387 15.24,-48.387 16.51,-48.387 17.78,-48.387 25.4,-48.387 26.67,-48.387 4.445,-47.117 5.715,-47.117 6.985,-47.117 8.255,-47.117 9.525,-47.117 13.335,-47.117 14.605,-47.117 15.875,-47.117 17.145,-47.117 18.415,-47.117 24.765,-47.117 26.035,-47.117 3.81,-45.847 5.08,-45.847 6.35,-45.847 7.62,-45.847 8.89,-45.847 10.16,-45.847 12.7,-45.847 13.97,-45.847 15.24,-45.847 16.51,-45.847 17.78,-45.847 19.05,-45.847 20.32,-45.847 21.59,-45.847 22.86,-45.847 24.13,-45.847 25.4,-45.847 26.67,-45.847 1.905,-44.577 3.175,-44.577 10.795,-44.577 12.065,-44.577 13.335,-44.577 14.605,-44.577 26.035,-44.577 12.7,-43.307 13.97,-43.307 15.24,-43.307 25.4,-43.307 26.67,-43.307 1.905,-42.037 26.035,-42.037 25.4,-40.767 26.67,-40.767 18.415,-39.497 19.685,-39.497 20.955,-39.497 22.225,-39.497 5.715,-36.957 6.985,-36.957 22.225,-36.957 5.08,-35.687 22.86,-35.687 1.905,-34.417 3.175,-34.417 4.445,-34.417 23.495,-34.417 24.765,-34.417 26.035,-34.417 3.81,-33.147 5.08,-33.147 6.35,-33.147 7.62,-33.147 26.67,-33.147 4.445,-31.877 5.715,-31.877 6.985,-31.877 8.255,-31.877 9.525,-31.877 18.415,-31.877 3.81,-30.607 5.08,-30.607 6.35,-30.607 7.62,-30.607 8.89,-30.607 10.16,-30.607 1.905,-29.337 4.445,-29.337 5.715,-29.337 6.985,-29.337 8.255,-29.337 9.525,-29.337 10.795,-29.337 19.685,-29.337 20.955,-29.337 3.81,-28.067 6.35,-28.067 7.62,-28.067 8.89,-28.067 10.16,-28.067 11.43,-28.067 19.05,-28.067 20.32,-28.067 21.59,-28.067 22.86,-28.067 24.13,-28.067 26.67,-28.067 1.905,-26.797 4.445,-26.797 6.985,-26.797 10.795,-26.797 19.685,-26.797 20.955,-26.797 22.225,-26.797 23.495,-26.797 26.035,-26.797 3.81,-25.527 24.13,-25.527 26.67,-25.527 1.905,-24.257 26.035,-24.257 24.13,-22.987 26.67,-22.987 1.905,-21.717 3.175,-21.717 26.035,-21.717 3.81,-20.447 6.35,-20.447 7.62,-20.447 8.89,-20.447 16.51,-20.447 19.05,-20.447 26.67,-20.447 1.905,-19.177 3.175,-19.177 6.985,-19.177 8.255,-19.177 18.415,-19.177 24.765,-19.177 26.035,-19.177 3.81,-17.907 5.08,-17.907 6.35,-17.907 7.62,-17.907 16.51,-17.907 17.78,-17.907 22.86,-17.907 24.13,-17.907 26.67,-17.907 1.905,-16.637 15.875,-16.637 17.145,-16.637 26.035,-16.637 26.67,-15.367 15.875,-14.097 17.145,-14.097 19.685,-14.097 20.955,-14.097 22.225,-14.097 23.495,-14.097 24.765,-14.097 26.035,-14.097 3.81,-12.827 6.35,-12.827 7.62,-12.827 26.67,-12.827 1.905,-11.557 3.175,-11.557 5.715,-11.557 6.985,-11.557 8.255,-11.557 9.525,-11.557 14.605,-11.557 24.765,-11.557 26.035,-11.557 3.81,-10.287 5.08,-10.287 6.35,-10.287 7.62,-10.287 21.59,-10.287 24.13,-10.287 26.67,-10.287 1.905,-9.017 3.175,-9.017 4.445,-9.017 5.715,-9.017 6.985,-9.017 8.255,-9.017 13.335,-9.017 18.415,-9.017 20.955,-9.017 22.225,-9.017 24.765,-9.017 26.035,-9.017 3.81,-7.747 5.08,-7.747 6.35,-7.747 7.62,-7.747 21.59,-7.747 22.86,-7.747 24.13,-7.747 26.67,-7.747 1.905,-6.477 4.445,-6.477 5.715,-6.477 6.985,-6.477 8.255,-6.477 15.875,-6.477 18.415,-6.477 20.955,-6.477 22.225,-6.477 23.495,-6.477 24.765,-6.477 26.035,-6.477 12.7,-5.207 13.97,-5.207 15.24,-5.207 16.51,-5.207 17.78,-5.207 19.05,-5.207 20.32,-5.207 21.59,-5.207 22.86,-5.207 24.13,-5.207 26.67,-5.207 5.715,-3.937 6.985,-3.937 8.255,-3.937 9.525,-3.937 10.795,-3.937 12.065,-3.937 13.335,-3.937 14.605,-3.937 15.875,-3.937 17.145,-3.937 18.415,-3.937 19.685,-3.937 20.955,-3.937 22.225,-3.937 6.35,-2.667 7.62,-2.667 8.89,-2.667 10.16,-2.667 11.43,-2.667 12.7,-2.667 13.97,-2.667 15.24,-2.667 16.51,-2.667 17.78,-2.667 19.05,-2.667 20.32,-2.667 21.59,-2.667
NetC2_2: C2.2 F1.2 U1.3 U1.5 | length 7.2
  SIG1 w0.178: U1.3 11.662,-33.467 12.104,-33.909 13.12,-33.909 13.562,-34.351 U1.5
  SIG1 w0.508: U1.3@11.55,-32.347 U1.3 ; F1.2@13.603,-36.651 F1.2 13.576,-36.652 13.576,-35.372 U1.5 C2.2@14.986,-35.359
NetD1_2: D1.2 R3.2 | length 1.8
  SIG1 w0.508: R3.2 D1.2
NetD2_1: D2.1 D3.1 F1.1 | length 3.2
  SIG1 w0.508: D3.1 13.604,-39.408 ; F1.1 13.589,-39.393 13.604,-39.408 ; D2.1 13.604,-39.408
NetJ4_A5: J4.A5 R1.1 | length 6.4
  SIG1 w0.178: v1(6.048,-40.084) R1.1 ; v1(6.429,-44.244) J4.A5
  SIG2 w0.178: v1(6.048,-40.084) 6.429,-40.465 v1(6.429,-44.244)
NetJ4_B5: J4.B5 R2.1 | length 6.4
  SIG1 w0.178: v1(7.429,-44.259) J4.B5 ; v1(7.81,-40.084) R2.1
  SIG2 w0.178: v1(7.429,-44.259) 7.429,-40.465 v1(7.81,-40.084)
PA1: C4.2 J2.10 U2.5 Y1.1 | length 19.3
  SIG1 w0.178: J2.10 4.699,-12.065 4.699,-14.859 5.156,-15.316 C4.2 Y1.1 9.017,-15.443 9.017,-18.542 10.033,-19.558 14.226,-19.558 U2.5
PA2: C5.2 J2.09 U2.6 Y1.2 | length 26.3
  SIG1 w0.178: J2.09 2.794,-12.573 3.937,-13.716 3.937,-15.24 5.715,-17.018 C5.2 Y1.2 9.525,-24.435 9.525,-20.701 10.16,-20.066 14.226,-20.066 U2.6
PC0: J2.06 U2.10 | length 12.8
  SIG1 w0.178: v1(12.573,-22.86) 14.174,-22.86 U2.10
  SIG2 w0.178: J2.06 5.334,-22.86 v1(12.573,-22.86)
PC1: J2.05 U2.11 | length 18.4
  SIG1 w0.178: v1(12.573,-23.495) 19.634,-23.495 20.005,-23.125 20.005,-22.873 20.141,-22.737 U2.11
  SIG2 w0.178: J2.05 3.429,-23.495 v1(12.573,-23.495)
PC2: J2.04 U2.12 | length 21.6
  SIG1 w0.178: v1(12.573,-24.13) 20.574,-24.13 21.336,-23.368 21.336,-22.479 21.056,-22.199 20.359,-22.199 U2.12
  SIG2 w0.178: J2.04 3.81,-24.13 v1(12.573,-24.13)
PC3: J2.03 U2.13 | length 24.6
  SIG1 w0.178: v1(12.573,-24.765) 20.955,-24.765 21.844,-23.876 21.844,-21.844 21.437,-21.437 U2.13
  SIG2 w0.178: J2.03 5.715,-24.765 v1(12.573,-24.765)
PC4: J2.02 U2.14 | length 27.6
  SIG1 w0.178: v1(12.573,-25.4) 21.336,-25.4 22.479,-24.257 22.479,-21.59 21.676,-20.787 U2.14
  SIG2 w0.178: J2.02 7.62,-25.4 v1(12.573,-25.4)
PC5: J3.03 U2.15 | length 10.7
  SIG1 w0.178: U2.15 21.661,-20.137 23.114,-21.59 23.114,-25.4 J3.03
PC6: J3.04 U2.16 | length 8.8
  SIG1 w0.178: U2.16 21.65,-19.487 23.495,-21.332 23.495,-23.241 J3.04
PC7: J3.05 U2.17 | length 6.9
  SIG1 w0.178: U2.17 21.504,-18.837 25.4,-22.733 J3.05
PD0: J2.07 U2.8 | length 14
  SIG1 w0.178: v1(11.811,-22.098) 11.811,-21.681 12.055,-21.437 U2.8
  SIG2 w0.178: J2.07 7.112,-22.098 v1(11.811,-22.098)
PD1: J2.11 J5.5 U2.18 | length 27.2
  SIG1 w0.178: J2.11 4.572,-5.588 12.192,-5.588 J5.5 ; v1(18.542,-18.161) 18.555,-18.174 20.234,-18.174 U2.18
  SIG2 w0.178: J5.5 15.367,-8.763 15.367,-11.1 18.542,-14.275 v1(18.542,-18.161)
PD2: J3.06 U2.19 | length 6.4
  SIG1 w0.178: U2.19 21.651,-17.537 24.307,-20.193 J3.06
PD3: J3.07 U2.20 | length 5.6
  SIG1 w0.178: U2.20 24.761,-16.887 J3.07
PD4: J3.08 U2.1 | length 12.5
  SIG1 w0.178: U2.1 14.548,-16.887 14.685,-16.751 14.685,-15.922 15.494,-15.113 J3.08
PD5: J3.09 U2.2 | length 17.3
  SIG1 w0.178: U2.2 12.965,-17.537 12.573,-17.145 12.573,-16.129 16.129,-12.573 J3.09
PD6: J3.10 U2.3 | length 20.1
  SIG1 w0.178: U2.3 12.726,-18.187 12.065,-17.526 12.065,-15.748 15.875,-11.938 23.622,-11.938 J3.10
PD7: C3.2 J3.11 S1.2 U2.4 | length 45.7
  SIG1 w0.178: v1@15.976,-18.837 U2.4 12.614,-18.837 11.684,-17.907 11.684,-15.367 15.621,-11.43 21.59,-11.43 J3.11 ; C3.2 19.962,-33.759 20.447,-33.274 S1.2 20.366,-30.404 v1(18.898,-30.404)
  SIG2 w0.178: v1(15.989,-18.85) 17.072,-18.85 17.983,-19.761 17.983,-30.104 18.283,-30.404 v1(18.898,-30.404)
RST: J5.10
SWCLK: J5.1
U_RX: J5.4
U_TX: J5.2
USB_5V: D3.2 J3.02 J4.A9 J4.B9
  other v2: 9.246,-41.224
V_BAT: D2.2 J1.1

## Polygon pours and split planes (outlines as drawn)
GND on PWR "PWR-GND" (solid, pour order 34): 0,-50.927 28.321,-50.927 28.321,0 0,0
3V3 on PWR "NONET_L-01_P-001" (solid, pour order 31): 12.471,-38.862 17.526,-33.807 17.526,-21.59 11.303,-21.59 11.303,-22.479 12.167,-22.479 12.167,-30.067 11.084,-31.15 8.382,-33.851 8.382,-38.862
3V3 on PWR "NONET_L-01_P-001" (solid, pour order 24): 10.287,-5.715 10.287,-16.535 12.065,-16.535 12.065,-21.59 15.367,-21.59 15.367,-13.208 12.827,-10.668 12.827,-5.715
3V3 on PWR "NONET_L-01_P-001" (solid, pour order 22): 1.651,-13.843 1.651,-15.748 2.413,-16.51 10.287,-16.51 10.287,-13.843
USB_5V on PWR "NONET_L-01_P-001" (solid, pour order 20): 8.382,-39.624 12.446,-39.624 15.24,-36.83 22.987,-29.083 26.797,-29.083 26.797,-31.623 25.146,-31.623 14.605,-42.164 8.382,-42.164
GND on SIG1 "SIG1-GND" (solid, pour order 30): 0,-50.927 28.321,-50.927 28.321,0 0,0
USB_5V on SIG1 "PWR-USB_5V" (solid, pour order 23): 3.683,-45.212 3.683,-40.259 10.16,-40.259 10.16,-45.212
3V3 on SIG1 "NONET_L-01_P-001" (solid, pour order 18): 15.172,-21.624 15.206,-21.59 17.272,-21.59 17.272,-22.606 12.192,-22.606 12.192,-21.599
V_BAT on SIG1 "PWR-V_BAT" (solid, pour order 21): 15.875,-44.45 15.875,-40.386 24.892,-40.386 24.892,-44.45
V_BAT on SIG1 "NONET_L-01_P-001" (solid, pour order 16): 15.875,-42.037 17.78,-42.037 17.78,-38.862 15.875,-38.862
USB_5V on SIG1 "NONET_L-01_P-001" (solid, pour order 17): 8.382,-41.91 8.382,-40.259 9.525,-39.116 11.176,-39.116 11.176,-40.894 10.16,-41.91
3V3 on SIG1 "NONET_L-01_P-001" (solid, pour order 29): 12.087,-34.734 7.938,-34.734 7.874,-34.798 7.874,-36.449 8.636,-37.211 8.636,-38.862 12.042,-38.862 12.087,-38.908
GND on GND "GND-GND" (solid, pour order 19): 0,-50.927 28.321,-50.927 28.321,0 0,0
GND on SIG2 "SIG2-GND" (solid, pour order 26): 0,-50.927 28.321,-50.927 28.321,0 0,0

## Keep-outs
Keep-Out Layer:
  the board outline again, w1.27

## Silkscreen, mask and mechanical layers (free items; w line width, h text height)
Mechanical 1:
  lines w0.178: 0,-50.927 0,0 ; 0,-50.927 0,0 ; 0,-50.927 28.321,-50.927 ; 0,-50.927 28.321,-50.927 ; 0,0 28.321,0 ; 0,0 28.321,0 ; 28.321,-50.927 28.321,0 ; 28.321,-50.927 28.321,0
Drill Drawing:
  lines w0.178: 0,-50.927 28.321,-50.927 ; 0,-50.927 0,0 ; 0,-50.927 0,0 ; 0,-50.927 28.321,-50.927 ; 0,0 28.321,0 ; 0,0 28.321,0 ; 28.321,-50.927 28.321,0 ; 28.321,-50.927 28.321,0